# EAGLE board SparkFun-Blynk-Thing-ProtoPanel_v02 (EAGLE 7.5.0), part 1 of 7
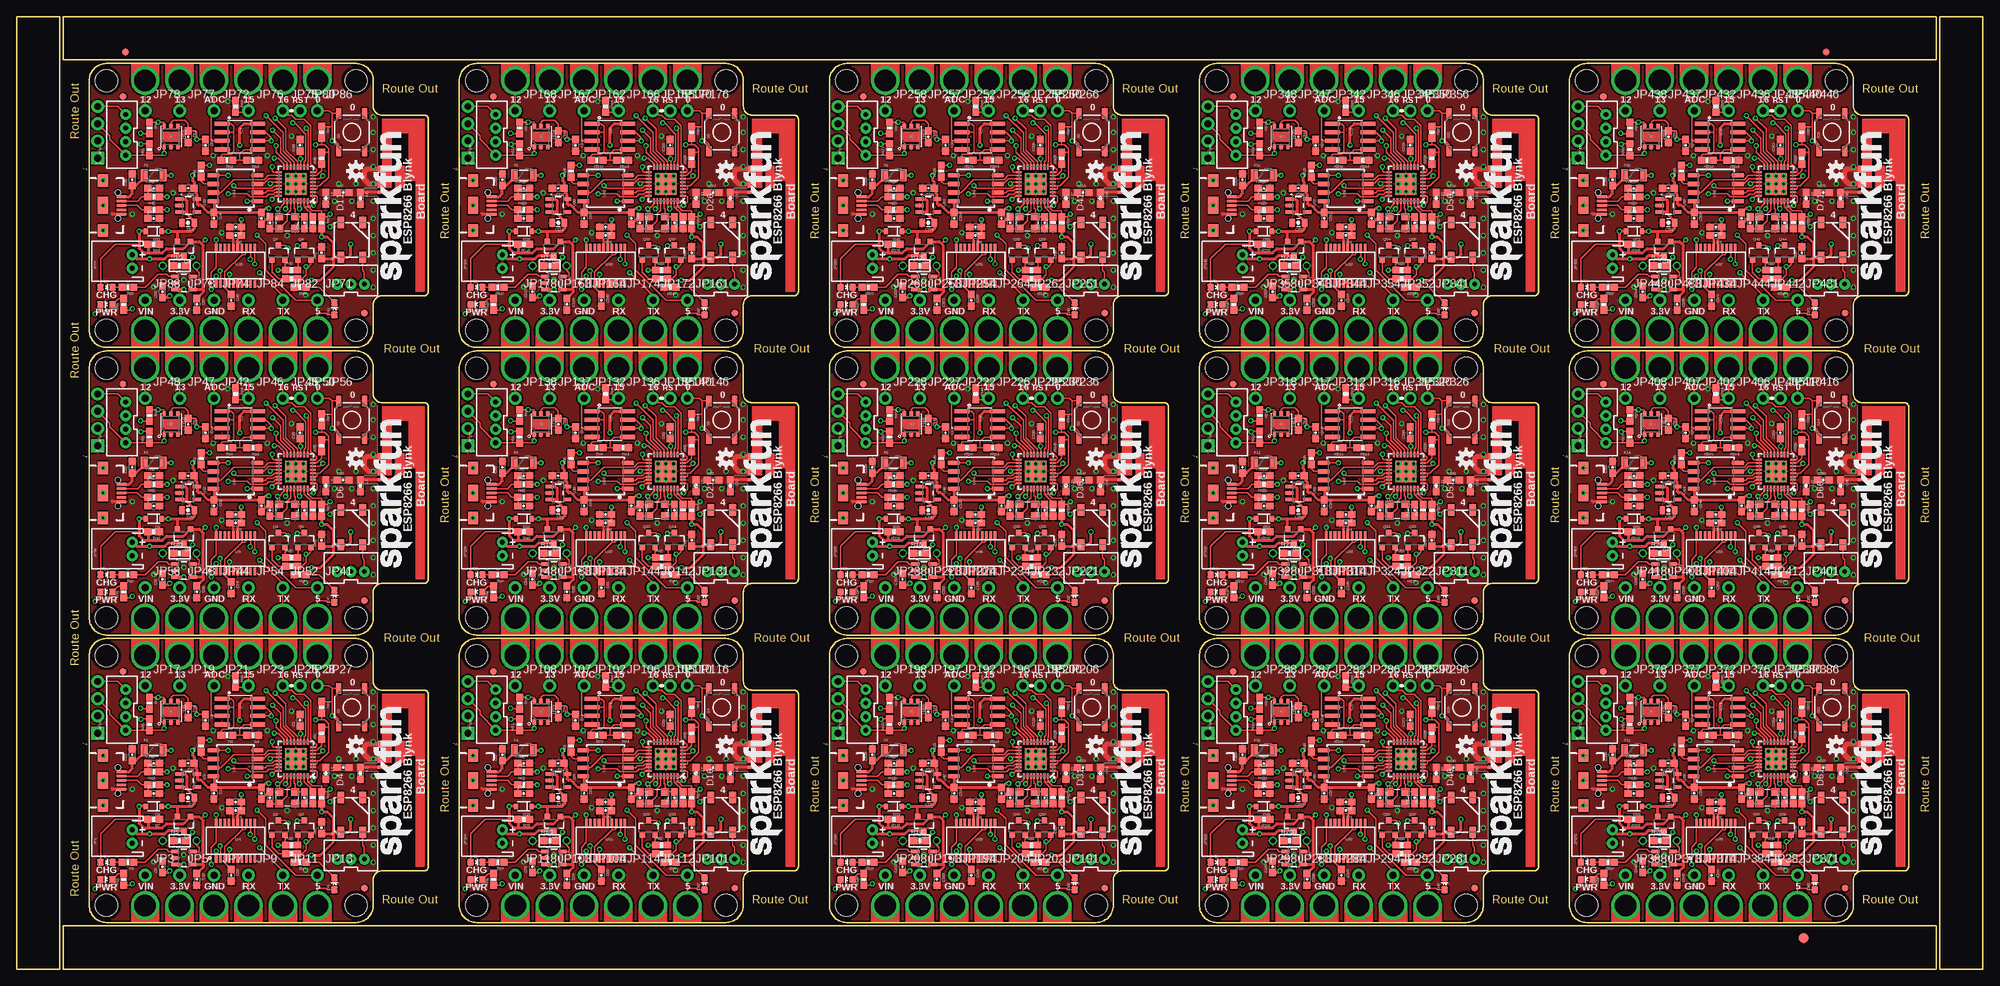
[diagram p0: board, top side]
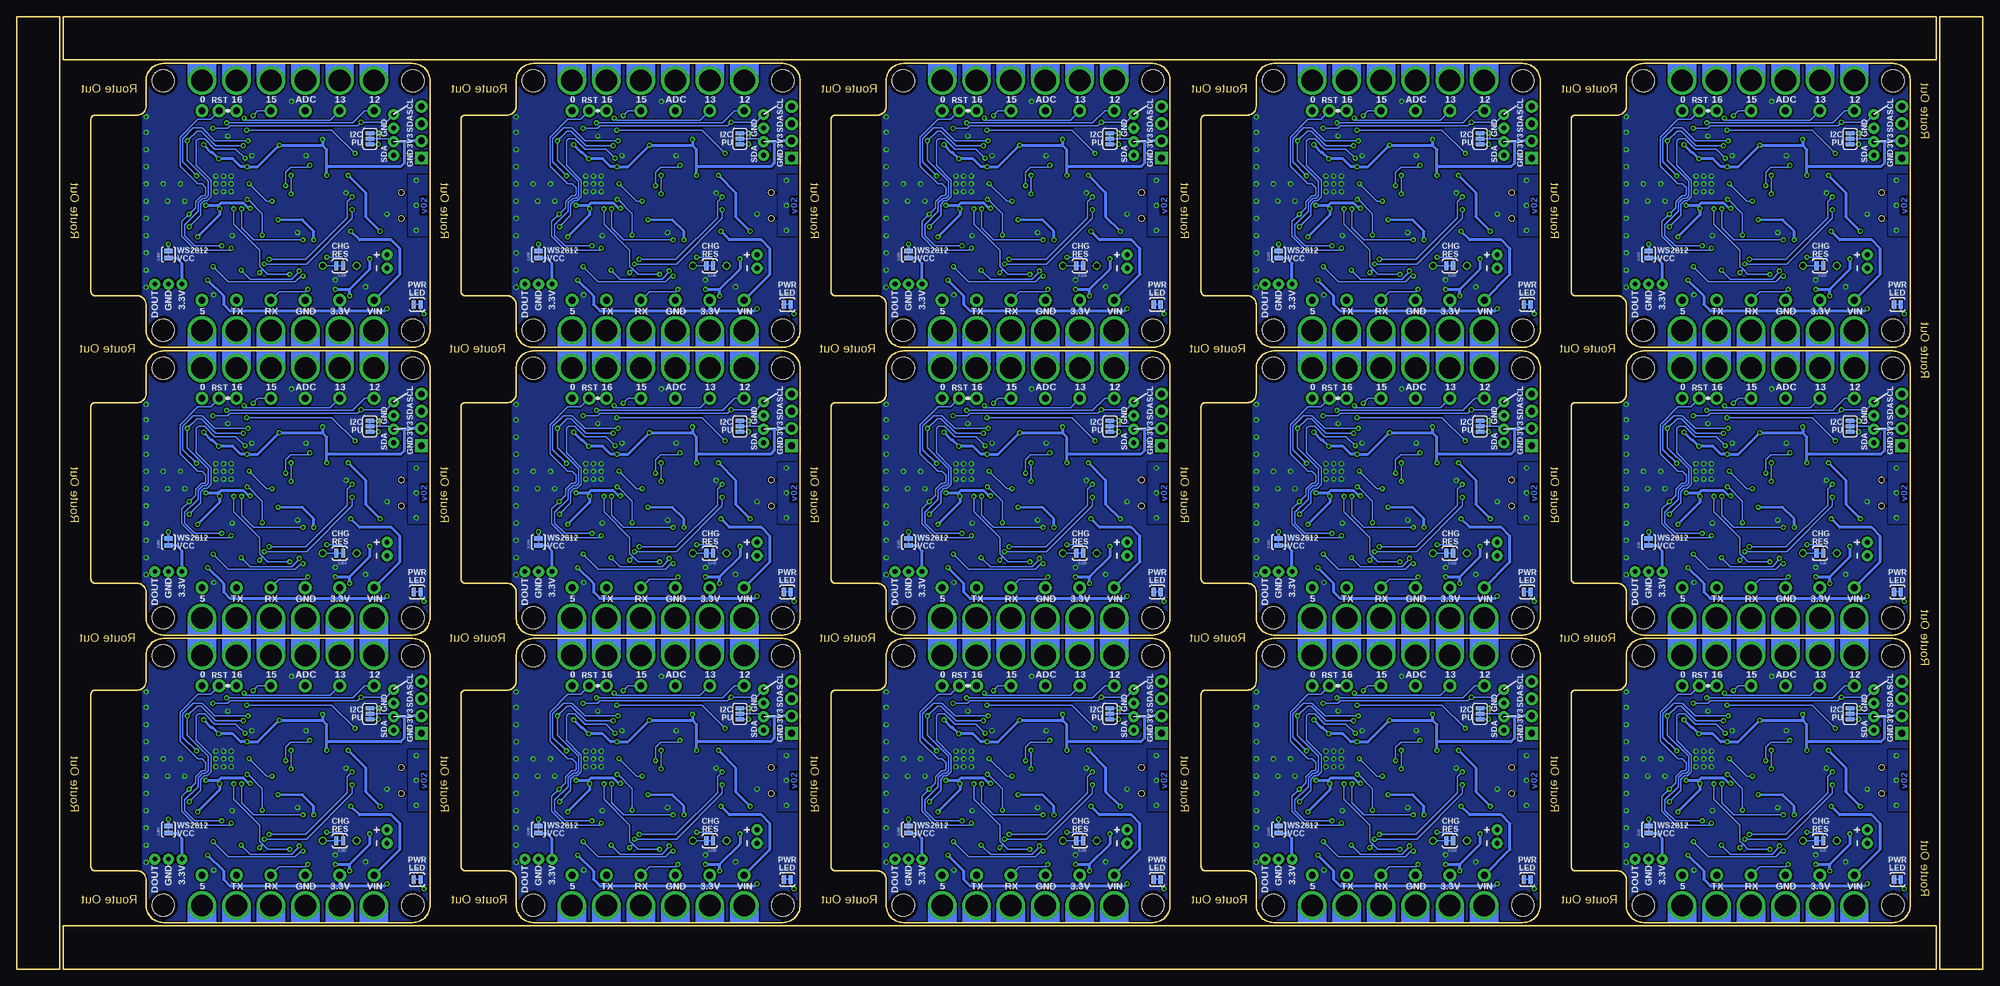
[diagram p1: board, bottom side, seen from below]

Size 290.07 x 140.46 mm. Coordinates in mm from the lower left corner, seen from the top.
Outline: 264 segments
Copper layers (1*16): Top 0.035mm / dielectric 1.5mm / Bottom 0.035mm
Design rules "SparkFun-2-layer-TIGHT": minimum track width 7mil, minimum drill 15mil, track to track 7mil, track to pad 7mil, pad to pad 7mil, via to via 7mil, smd to smd 7mil, copper to edge 7mil, drill to drill 7mil, minimum pad ring 7mil, minimum via ring 7mil, stop-mask expansion 4mil, vias tented up to drill 20mil, thermal gap 10mil

## Footprints (pad centres in the part's own frame; a part is rotated, then mirrored left to right if it is on the bottom)
0603-CAP = smd 1.1 x 1: 1 -0.85,0; 2 0.85,0
0805-CAP = smd 0.8 x 1.2: 1 -0.9,0; 2 0.9,0
LED-0603 = smd 1 x 1: A 0,-0.877; C 0,0.877
SOD-323 = smd 0.63 x 0.83: A 1.15,0; C -1.15,0
WS2812B = smd 1.651 x 1: 1 -2.577,1.6; 2 -2.577,-1.6; 3 2.577,-1.6; 4 2.577,1.6
TRACE_ANTENNA_2.4GHZ_25.7MM = smd 0.46 x 0.46: ANT 0,0.23 | smd 1 x 0.46: GND -1.18,0.23; GND2 -3.38,0.23
FIDUCIAL-1.5X3 = smd 1.5 x 1.5: 1 0,0
FIDUCIAL-1X2 = smd 1 x 1: 1 0,0
PTC-1206 = smd 1 x 1.8: 1 -1.4,0; 2 1.4,0
SO08 = smd 0.61 x 2.21: 1 -1.905,-2.616; 2 -0.635,-2.616; 3 0.635,-2.616; 4 1.905,-2.616; 5 1.905,2.616; 6 0.635,2.616; 7 -0.635,2.616; 8 -1.905,2.616
JST-2-PTH = drill 0.7 pad 1.6: 1 -1,0; 2 1,0
1X01_ALLIGATOR_3MM_HALF = drill 3.175: 1@2 0,0
1X01_NO_SILK = drill 1.016 pad 1.88: 1 0,0
JST-3-PTH-VERT = drill 0.7 pad 1.6: 1 -2,-0.55; 2 0,-0.55; 3 2,-0.55
USB-B-MICRO-SMD_V03 = smd 1.45 x 0.4: D+ 2.725,0; D- 2.725,0.65; GND 2.725,-1.3; ID 2.725,-0.65; VBUS 2.725,1.3 | smd 1.5 x 1.8: SHIELD1 0,3.685; SHIELD2 0,-3.685 | smd 1.5 x 2.5: SHIELD3 0,0 | hole 0.85: 2.2,1.9; 2.2,-1.9
JST-4-PTH-VERT = drill 0.7 pad 1.6: 1 -3,-0.55; 2 -1,-0.55; 3 1,-0.55; 4 3,-0.55
1X04_NO_SILK = drill 1.016 pad 1.88 square: 1 0,0 | drill 1.016 pad 1.88: 2 2.54,0; 3 5.08,0; 4 7.62,0
0603 = smd 1.1 x 1: 1 -0.85,0; 2 0.85,0
SOT23-3 = smd 0.8 x 0.9: 1 -0.95,-1; 2 0.95,-1; 3 0,1.1
SOT23-3@1 = smd 0.8 x 0.9: 1 -0.95,-1; 2 0.95,-1; 3 0,1.1
0603-RES = smd 1.1 x 1: 1 -0.85,0; 2 0.85,0
1/6W-RES = drill 0.762: 1 -2.5,0; 2 2.5,0
0603-RES@1 = smd 1.1 x 1: 1 -0.85,0; 2 0.85,0
TACTILE-SWITCH-SMD = smd 1.524 x 0.762: 1 -2.794,1.905; 2 2.794,1.905; 3 -2.794,-1.905; 4 2.794,-1.905
PAD-JUMPER-2-NC_BY_TRACE_YES_SILK = smd 0.635 x 1.27: 1 -0.508,0; 2 0.508,0
PAD-JUMPER-3-3OF3_NC_BY_TRACE_YES_SILK_FULL_BOX = smd 0.635 x 1.27: 1 -0.813,0; 2 0,0; 3 0.813,0
STAND-OFF = hole 3.302: 0,0
SOT23-5 = smd 0.55 x 1.2: 1 -0.95,-1.3; 2 0,-1.3; 3 0.95,-1.3; 4 0.95,1.3; 5 -0.95,1.3
QFN32 = smd 0.8 x 0.285: 1 -2.5,1.75; 2 -2.5,1.25; 3 -2.5,0.75; 4 -2.5,0.25; 5 -2.5,-0.25; 6 -2.5,-0.75; 7 -2.5,-1.25; 8 -2.5,-1.75; 17 2.5,-1.75; 18 2.5,-1.25; 19 2.5,-0.75; 20 2.5,-0.25; 21 2.5,0.25; 22 2.5,0.75; 23 2.5,1.25; 24 2.5,1.75 | smd 0.285 x 0.8: 9 -1.75,-2.5; 10 -1.25,-2.5; 11 -0.75,-2.5; 12 -0.25,-2.5; 13 0.25,-2.5; 14 0.75,-2.5; 15 1.25,-2.5; 16 1.75,-2.5; 25 1.75,2.5; 26 1.25,2.5; 27 0.75,2.5; 28 0.25,2.5; 29 -0.25,2.5; 30 -0.75,2.5; 31 -1.25,2.5; 32 -1.75,2.5 | smd 3.15 x 3.15: EP 0,0
SSOP20_L = smd 0.381 x 1.143: 1 -2.857,-2.68; 2 -2.223,-2.68; 3 -1.587,-2.68; 4 -0.953,-2.68; 5 -0.318,-2.68; 6 0.318,-2.68; 7 0.953,-2.68; 8 1.587,-2.68; 9 2.223,-2.68; 10 2.857,-2.68; 11 2.857,2.68; 12 2.223,2.68; 13 1.587,2.68; 14 0.953,2.68; 15 0.318,2.68; 16 -0.318,2.68; 17 -0.953,2.68; 18 -1.587,2.68; 19 -2.223,2.68; 20 -2.857,2.68
SOIC-8 = smd 0.61 x 1.702: 1 -1.905,-3.251; 2 -0.635,-3.251; 3 0.635,-3.251; 4 1.905,-3.251; 5 1.905,3.251; 6 0.635,3.251; 7 -0.635,3.251; 8 -1.905,3.251
SI7021 = smd 0.2 x 0.2: 7 0,0 | smd 0.8 x 0.5: DATA 1.5,-1; GND 1.5,0; NC@3 1.5,1; NC@4 -1.5,1; SCK -1.5,-1; VDD -1.5,0
CRYSTAL-SMD-3.2X2.5 = smd 1.2 x 1.1: 1 -1.175,-0.875; 2 1.175,-0.875; 3 1.175,0.875; 4 -1.175,0.875

## Placement (x,y rotation side)
C1  10uF  [0603-CAP]  36.07,25.91 270 top
C2  0.1uF  [0603-CAP]  41.78,36.7 90 top
C3  10pF  [0603-CAP]  37.34,25.27 270 top
C4  10pF  [0603-CAP]  42.42,25.27 90 top
C5  0.1uF  [0603-CAP]  27.81,36.7 270 top
C6  4.7uF  [0603-CAP]  21.46,15.11 90 top
C7  1.0uF  [0805-CAP]  25.27,25.27 180 top
C8  5.6pF  [0603-CAP]  48.13,29.72 0 top
C9  0.1uF  [0603-CAP]  44.96,20.83 90 top
C10  2.2uF  [0603-CAP]  25.27,30.35 180 top
C11  0.1uF  [0603-CAP]  17.02,31.62 90 top
C12  47pF  [0603-CAP]  20.19,30.35 0 top
C13  47pF  [0603-CAP]  20.19,25.91 0 top
C14  0.1uF  [0603-CAP]  32.26,23.37 180 top
C15  4.7uF  [0603-CAP]  32.26,24.64 180 top
C16  0.1uF  [0603-CAP]  31.62,13.84 270 top
C17  0.1uF  [0603-CAP]  29.08,25.91 270 top
C18  0.1uF  [0603-CAP]  25.27,37.97 270 top
C19  4.7uF  [0603-CAP]  26.54,13.21 270 top
C20  10uF  [0603-CAP]  36.07,68.33 270 top
C21  0.1uF  [0603-CAP]  29.08,68.33 270 top
C22  47pF  [0603-CAP]  20.19,68.33 0 top
C23  0.1uF  [0603-CAP]  32.26,65.79 180 top
C24  0.1uF  [0603-CAP]  31.62,56.26 270 top
C25  0.1uF  [0603-CAP]  41.78,79.12 90 top
C26  10pF  [0603-CAP]  37.34,67.69 270 top
C27  10pF  [0603-CAP]  42.42,67.69 90 top
C28  5.6pF  [0603-CAP]  48.13,72.14 0 top
C29  0.1uF  [0603-CAP]  17.02,74.04 90 top
C30  47pF  [0603-CAP]  20.19,72.77 0 top
C31  4.7uF  [0603-CAP]  32.26,67.06 180 top
C32  0.1uF  [0603-CAP]  25.27,80.39 270 top
C33  0.1uF  [0603-CAP]  44.96,63.25 90 top
C34  0.1uF  [0603-CAP]  27.81,79.12 270 top
C35  1.0uF  [0805-CAP]  25.27,67.69 180 top
C36  2.2uF  [0603-CAP]  25.27,72.77 180 top
C37  4.7uF  [0603-CAP]  21.46,57.53 90 top
C38  4.7uF  [0603-CAP]  26.54,55.63 270 top
C39  10uF  [0603-CAP]  36.07,110.74 270 top
C40  0.1uF  [0603-CAP]  29.08,110.74 270 top
C41  47pF  [0603-CAP]  20.19,110.74 0 top
C42  0.1uF  [0603-CAP]  32.26,108.2 180 top
C43  0.1uF  [0603-CAP]  31.62,98.68 270 top
C44  0.1uF  [0603-CAP]  41.78,121.54 90 top
C45  10pF  [0603-CAP]  37.34,110.11 270 top
C46  10pF  [0603-CAP]  42.42,110.11 90 top
C47  5.6pF  [0603-CAP]  48.13,114.55 0 top
C48  0.1uF  [0603-CAP]  17.02,116.46 90 top
C49  47pF  [0603-CAP]  20.19,115.19 0 top
C50  4.7uF  [0603-CAP]  32.26,109.47 180 top
C51  0.1uF  [0603-CAP]  25.27,122.81 270 top
C52  0.1uF  [0603-CAP]  44.96,105.66 90 top
C53  0.1uF  [0603-CAP]  27.81,121.54 270 top
C54  1.0uF  [0805-CAP]  25.27,110.11 180 top
C55  2.2uF  [0603-CAP]  25.27,115.19 180 top
C56  4.7uF  [0603-CAP]  21.46,99.95 90 top
C57  4.7uF  [0603-CAP]  26.54,98.04 270 top
C58  10uF  [0603-CAP]  90.68,25.91 270 top
C59  0.1uF  [0603-CAP]  83.69,25.91 270 top
C60  47pF  [0603-CAP]  74.8,25.91 0 top
C61  0.1uF  [0603-CAP]  86.87,23.37 180 top
C62  0.1uF  [0603-CAP]  86.23,13.84 270 top
C63  0.1uF  [0603-CAP]  96.39,36.7 90 top
C64  10pF  [0603-CAP]  91.95,25.27 270 top
C65  10pF  [0603-CAP]  97.03,25.27 90 top
C66  5.6pF  [0603-CAP]  102.74,29.72 0 top
C67  0.1uF  [0603-CAP]  71.63,31.62 90 top
C68  47pF  [0603-CAP]  74.8,30.35 0 top
C69  4.7uF  [0603-CAP]  86.87,24.64 180 top
C70  0.1uF  [0603-CAP]  79.88,37.97 270 top
C71  0.1uF  [0603-CAP]  99.57,20.83 90 top
C72  0.1uF  [0603-CAP]  82.42,36.7 270 top
C73  1.0uF  [0805-CAP]  79.88,25.27 180 top
C74  2.2uF  [0603-CAP]  79.88,30.35 180 top
C75  4.7uF  [0603-CAP]  76.07,15.11 90 top
C76  4.7uF  [0603-CAP]  81.15,13.21 270 top
C77  10uF  [0603-CAP]  90.68,68.33 270 top
C78  0.1uF  [0603-CAP]  83.69,68.33 270 top
C79  47pF  [0603-CAP]  74.8,68.33 0 top
C80  0.1uF  [0603-CAP]  86.87,65.79 180 top
C81  0.1uF  [0603-CAP]  86.23,56.26 270 top
C82  0.1uF  [0603-CAP]  96.39,79.12 90 top
C83  10pF  [0603-CAP]  91.95,67.69 270 top
C84  10pF  [0603-CAP]  97.03,67.69 90 top
C85  5.6pF  [0603-CAP]  102.74,72.14 0 top
C86  0.1uF  [0603-CAP]  71.63,74.04 90 top
C87  47pF  [0603-CAP]  74.8,72.77 0 top
C88  4.7uF  [0603-CAP]  86.87,67.06 180 top
C89  0.1uF  [0603-CAP]  79.88,80.39 270 top
C90  0.1uF  [0603-CAP]  99.57,63.25 90 top
C91  0.1uF  [0603-CAP]  82.42,79.12 270 top
C92  1.0uF  [0805-CAP]  79.88,67.69 180 top
C93  2.2uF  [0603-CAP]  79.88,72.77 180 top
C94  4.7uF  [0603-CAP]  76.07,57.53 90 top
C95  4.7uF  [0603-CAP]  81.15,55.63 270 top
C96  10uF  [0603-CAP]  90.68,110.74 270 top
C97  0.1uF  [0603-CAP]  83.69,110.74 270 top
C98  47pF  [0603-CAP]  74.8,110.74 0 top
C99  0.1uF  [0603-CAP]  86.87,108.2 180 top
C100  0.1uF  [0603-CAP]  86.23,98.68 270 top
C101  0.1uF  [0603-CAP]  96.39,121.54 90 top
C102  10pF  [0603-CAP]  91.95,110.11 270 top
C103  10pF  [0603-CAP]  97.03,110.11 90 top
C104  5.6pF  [0603-CAP]  102.74,114.55 0 top
C105  0.1uF  [0603-CAP]  71.63,116.46 90 top
C106  47pF  [0603-CAP]  74.8,115.19 0 top
C107  4.7uF  [0603-CAP]  86.87,109.47 180 top
C108  0.1uF  [0603-CAP]  79.88,122.81 270 top
C109  0.1uF  [0603-CAP]  99.57,105.66 90 top
C110  0.1uF  [0603-CAP]  82.42,121.54 270 top
C111  1.0uF  [0805-CAP]  79.88,110.11 180 top
C112  2.2uF  [0603-CAP]  79.88,115.19 180 top
C113  4.7uF  [0603-CAP]  76.07,99.95 90 top
C114  4.7uF  [0603-CAP]  81.15,98.04 270 top
C115  10uF  [0603-CAP]  145.29,25.91 270 top
C116  0.1uF  [0603-CAP]  138.3,25.91 270 top
C117  47pF  [0603-CAP]  129.41,25.91 0 top
C118  0.1uF  [0603-CAP]  141.48,23.37 180 top
C119  0.1uF  [0603-CAP]  140.84,13.84 270 top
C120  0.1uF  [0603-CAP]  151,36.7 90 top
C121  10pF  [0603-CAP]  146.56,25.27 270 top
C122  10pF  [0603-CAP]  151.64,25.27 90 top
C123  5.6pF  [0603-CAP]  157.35,29.72 0 top
C124  0.1uF  [0603-CAP]  126.24,31.62 90 top
C125  47pF  [0603-CAP]  129.41,30.35 0 top
C126  4.7uF  [0603-CAP]  141.48,24.64 180 top
C127  0.1uF  [0603-CAP]  134.49,37.97 270 top
C128  0.1uF  [0603-CAP]  154.18,20.83 90 top
C129  0.1uF  [0603-CAP]  137.03,36.7 270 top
C130  1.0uF  [0805-CAP]  134.49,25.27 180 top
C131  2.2uF  [0603-CAP]  134.49,30.35 180 top
C132  4.7uF  [0603-CAP]  130.68,15.11 90 top
C133  4.7uF  [0603-CAP]  135.76,13.21 270 top
C134  10uF  [0603-CAP]  145.29,68.33 270 top
C135  0.1uF  [0603-CAP]  138.3,68.33 270 top
C136  47pF  [0603-CAP]  129.41,68.33 0 top
C137  0.1uF  [0603-CAP]  141.48,65.79 180 top
C138  0.1uF  [0603-CAP]  140.84,56.26 270 top
C139  0.1uF  [0603-CAP]  151,79.12 90 top
C140  10pF  [0603-CAP]  146.56,67.69 270 top
C141  10pF  [0603-CAP]  151.64,67.69 90 top
C142  5.6pF  [0603-CAP]  157.35,72.14 0 top
C143  0.1uF  [0603-CAP]  126.24,74.04 90 top
C144  47pF  [0603-CAP]  129.41,72.77 0 top
C145  4.7uF  [0603-CAP]  141.48,67.06 180 top
C146  0.1uF  [0603-CAP]  134.49,80.39 270 top
C147  0.1uF  [0603-CAP]  154.18,63.25 90 top
C148  0.1uF  [0603-CAP]  137.03,79.12 270 top
C149  1.0uF  [0805-CAP]  134.49,67.69 180 top
C150  2.2uF  [0603-CAP]  134.49,72.77 180 top
C151  4.7uF  [0603-CAP]  130.68,57.53 90 top
C152  4.7uF  [0603-CAP]  135.76,55.63 270 top
C153  10uF  [0603-CAP]  145.29,110.74 270 top
C154  0.1uF  [0603-CAP]  138.3,110.74 270 top
C155  47pF  [0603-CAP]  129.41,110.74 0 top
C156  0.1uF  [0603-CAP]  141.48,108.2 180 top
C157  0.1uF  [0603-CAP]  140.84,98.68 270 top
C158  0.1uF  [0603-CAP]  151,121.54 90 top
C159  10pF  [0603-CAP]  146.56,110.11 270 top
C160  10pF  [0603-CAP]  151.64,110.11 90 top
C161  5.6pF  [0603-CAP]  157.35,114.55 0 top
C162  0.1uF  [0603-CAP]  126.24,116.46 90 top
C163  47pF  [0603-CAP]  129.41,115.19 0 top
C164  4.7uF  [0603-CAP]  141.48,109.47 180 top
C165  0.1uF  [0603-CAP]  134.49,122.81 270 top
C166  0.1uF  [0603-CAP]  154.18,105.66 90 top
C167  0.1uF  [0603-CAP]  137.03,121.54 270 top
C168  1.0uF  [0805-CAP]  134.49,110.11 180 top
C169  2.2uF  [0603-CAP]  134.49,115.19 180 top
C170  4.7uF  [0603-CAP]  130.68,99.95 90 top
C171  4.7uF  [0603-CAP]  135.76,98.04 270 top
C172  10uF  [0603-CAP]  199.9,25.91 270 top
C173  0.1uF  [0603-CAP]  192.91,25.91 270 top
C174  47pF  [0603-CAP]  184.02,25.91 0 top
C175  0.1uF  [0603-CAP]  196.09,23.37 180 top
C176  0.1uF  [0603-CAP]  195.45,13.84 270 top
C177  0.1uF  [0603-CAP]  205.61,36.7 90 top
C178  10pF  [0603-CAP]  201.17,25.27 270 top
C179  10pF  [0603-CAP]  206.25,25.27 90 top
C180  5.6pF  [0603-CAP]  211.96,29.72 0 top
C181  0.1uF  [0603-CAP]  180.85,31.62 90 top
C182  47pF  [0603-CAP]  184.02,30.35 0 top
C183  4.7uF  [0603-CAP]  196.09,24.64 180 top
C184  0.1uF  [0603-CAP]  189.1,37.97 270 top
C185  0.1uF  [0603-CAP]  208.79,20.83 90 top
C186  0.1uF  [0603-CAP]  191.64,36.7 270 top
C187  1.0uF  [0805-CAP]  189.1,25.27 180 top
C188  2.2uF  [0603-CAP]  189.1,30.35 180 top
C189  4.7uF  [0603-CAP]  185.29,15.11 90 top
C190  4.7uF  [0603-CAP]  190.37,13.21 270 top
C191  10uF  [0603-CAP]  199.9,68.33 270 top
C192  0.1uF  [0603-CAP]  192.91,68.33 270 top
C193  47pF  [0603-CAP]  184.02,68.33 0 top
C194  0.1uF  [0603-CAP]  196.09,65.79 180 top
C195  0.1uF  [0603-CAP]  195.45,56.26 270 top
C196  0.1uF  [0603-CAP]  205.61,79.12 90 top
C197  10pF  [0603-CAP]  201.17,67.69 270 top
C198  10pF  [0603-CAP]  206.25,67.69 90 top
C199  5.6pF  [0603-CAP]  211.96,72.14 0 top
C200  0.1uF  [0603-CAP]  180.85,74.04 90 top
C201  47pF  [0603-CAP]  184.02,72.77 0 top
C202  4.7uF  [0603-CAP]  196.09,67.06 180 top
C203  0.1uF  [0603-CAP]  189.1,80.39 270 top
C204  0.1uF  [0603-CAP]  208.79,63.25 90 top
C205  0.1uF  [0603-CAP]  191.64,79.12 270 top
C206  1.0uF  [0805-CAP]  189.1,67.69 180 top
C207  2.2uF  [0603-CAP]  189.1,72.77 180 top
C208  4.7uF  [0603-CAP]  185.29,57.53 90 top
C209  4.7uF  [0603-CAP]  190.37,55.63 270 top
C210  10uF  [0603-CAP]  199.9,110.74 270 top
C211  0.1uF  [0603-CAP]  192.91,110.74 270 top
C212  47pF  [0603-CAP]  184.02,110.74 0 top
C213  0.1uF  [0603-CAP]  196.09,108.2 180 top
C214  0.1uF  [0603-CAP]  195.45,98.68 270 top
C215  0.1uF  [0603-CAP]  205.61,121.54 90 top
C216  10pF  [0603-CAP]  201.17,110.11 270 top
C217  10pF  [0603-CAP]  206.25,110.11 90 top
C218  5.6pF  [0603-CAP]  211.96,114.55 0 top
C219  0.1uF  [0603-CAP]  180.85,116.46 90 top
C220  47pF  [0603-CAP]  184.02,115.19 0 top
C221  4.7uF  [0603-CAP]  196.09,109.47 180 top
C222  0.1uF  [0603-CAP]  189.1,122.81 270 top
C223  0.1uF  [0603-CAP]  208.79,105.66 90 top
C224  0.1uF  [0603-CAP]  191.64,121.54 270 top
C225  1.0uF  [0805-CAP]  189.1,110.11 180 top
C226  2.2uF  [0603-CAP]  189.1,115.19 180 top
C227  4.7uF  [0603-CAP]  185.29,99.95 90 top
C228  4.7uF  [0603-CAP]  190.37,98.04 270 top
C229  10uF  [0603-CAP]  254.51,25.91 270 top
C230  0.1uF  [0603-CAP]  247.52,25.91 270 top
C231  47pF  [0603-CAP]  238.63,25.91 0 top
C232  0.1uF  [0603-CAP]  250.7,23.37 180 top
C233  0.1uF  [0603-CAP]  250.06,13.84 270 top
C234  0.1uF  [0603-CAP]  260.22,36.7 90 top
C235  10pF  [0603-CAP]  255.78,25.27 270 top
C236  10pF  [0603-CAP]  260.86,25.27 90 top
C237  5.6pF  [0603-CAP]  266.57,29.72 0 top
C238  0.1uF  [0603-CAP]  235.46,31.62 90 top
C239  47pF  [0603-CAP]  238.63,30.35 0 top
C240  4.7uF  [0603-CAP]  250.7,24.64 180 top
C241  0.1uF  [0603-CAP]  243.71,37.97 270 top
C242  0.1uF  [0603-CAP]  263.4,20.83 90 top
C243  0.1uF  [0603-CAP]  246.25,36.7 270 top
C244  1.0uF  [0805-CAP]  243.71,25.27 180 top
C245  2.2uF  [0603-CAP]  243.71,30.35 180 top
C246  4.7uF  [0603-CAP]  239.9,15.11 90 top
C247  4.7uF  [0603-CAP]  244.98,13.21 270 top
C248  10uF  [0603-CAP]  254.51,68.33 270 top
C249  0.1uF  [0603-CAP]  247.52,68.33 270 top
C250  47pF  [0603-CAP]  238.63,68.33 0 top
C251  0.1uF  [0603-CAP]  250.7,65.79 180 top
C252  0.1uF  [0603-CAP]  250.06,56.26 270 top
C253  0.1uF  [0603-CAP]  260.22,79.12 90 top
C254  10pF  [0603-CAP]  255.78,67.69 270 top
C255  10pF  [0603-CAP]  260.86,67.69 90 top
C256  5.6pF  [0603-CAP]  266.57,72.14 0 top
C257  0.1uF  [0603-CAP]  235.46,74.04 90 top
C258  47pF  [0603-CAP]  238.63,72.77 0 top
C259  4.7uF  [0603-CAP]  250.7,67.06 180 top
C260  0.1uF  [0603-CAP]  243.71,80.39 270 top
C261  0.1uF  [0603-CAP]  263.4,63.25 90 top
C262  0.1uF  [0603-CAP]  246.25,79.12 270 top
C263  1.0uF  [0805-CAP]  243.71,67.69 180 top
C264  2.2uF  [0603-CAP]  243.71,72.77 180 top
C265  4.7uF  [0603-CAP]  239.9,57.53 90 top
C266  4.7uF  [0603-CAP]  244.98,55.63 270 top
C267  10uF  [0603-CAP]  254.51,110.74 270 top
C268  0.1uF  [0603-CAP]  247.52,110.74 270 top
C269  47pF  [0603-CAP]  238.63,110.74 0 top
C270  0.1uF  [0603-CAP]  250.7,108.2 180 top
C271  0.1uF  [0603-CAP]  250.06,98.68 270 top
C272  0.1uF  [0603-CAP]  260.22,121.54 90 top
C273  10pF  [0603-CAP]  255.78,110.11 270 top
C274  10pF  [0603-CAP]  260.86,110.11 90 top
C275  5.6pF  [0603-CAP]  266.57,114.55 0 top
C276  0.1uF  [0603-CAP]  235.46,116.46 90 top
C277  47pF  [0603-CAP]  238.63,115.19 0 top
C278  4.7uF  [0603-CAP]  250.7,109.47 180 top
C279  0.1uF  [0603-CAP]  243.71,122.81 270 top
C280  0.1uF  [0603-CAP]  263.4,105.66 90 top
C281  0.1uF  [0603-CAP]  246.25,121.54 270 top
C282  1.0uF  [0805-CAP]  243.71,110.11 180 top
C283  2.2uF  [0603-CAP]  243.71,115.19 180 top
C284  4.7uF  [0603-CAP]  239.9,99.95 90 top
C285  4.7uF  [0603-CAP]  244.98,98.04 270 top
D1  Yellow  [LED-0603]  13.21,15.75 270 top
D2  BAT20J  [SOD-323]  20.19,24 180 top
D3  BLUE  [LED-0603]  46.86,12.57 0 top
D4  WS2812  [WS2812B]  49.4,22.73 90 top
D5  RED  [LED-0603]  13.21,13.21 90 top
D6  WS2812  [WS2812B]  49.4,65.15 90 top
D7  BLUE  [LED-0603]  46.86,54.99 0 top
D8  BAT20J  [SOD-323]  20.19,66.42 180 top
D9  Yellow  [LED-0603]  13.21,58.17 270 top
D10  RED  [LED-0603]  13.21,55.63 90 top
D11  WS2812  [WS2812B]  49.4,107.57 90 top
D12  BLUE  [LED-0603]  46.86,97.41 0 top
D13  BAT20J  [SOD-323]  20.19,108.84 180 top
D14  Yellow  [LED-0603]  13.21,100.58 270 top
D15  RED  [LED-0603]  13.21,98.04 90 top
D16  WS2812  [WS2812B]  104.01,22.73 90 top
D17  BLUE  [LED-0603]  101.47,12.57 0 top
D18  BAT20J  [SOD-323]  74.8,24 180 top
D19  Yellow  [LED-0603]  67.82,15.75 270 top
D20  RED  [LED-0603]  67.82,13.21 90 top
D21  WS2812  [WS2812B]  104.01,65.15 90 top
D22  BLUE  [LED-0603]  101.47,54.99 0 top
D23  BAT20J  [SOD-323]  74.8,66.42 180 top
D24  Yellow  [LED-0603]  67.82,58.17 270 top
D25  RED  [LED-0603]  67.82,55.63 90 top
D26  WS2812  [WS2812B]  104.01,107.57 90 top
D27  BLUE  [LED-0603]  101.47,97.41 0 top
D28  BAT20J  [SOD-323]  74.8,108.84 180 top
D29  Yellow  [LED-0603]  67.82,100.58 270 top
D30  RED  [LED-0603]  67.82,98.04 90 top
D31  WS2812  [WS2812B]  158.62,22.73 90 top
D32  BLUE  [LED-0603]  156.08,12.57 0 top
D33  BAT20J  [SOD-323]  129.41,24 180 top
D34  Yellow  [LED-0603]  122.43,15.75 270 top
D35  RED  [LED-0603]  122.43,13.21 90 top
D36  WS2812  [WS2812B]  158.62,65.15 90 top
D37  BLUE  [LED-0603]  156.08,54.99 0 top
D38  BAT20J  [SOD-323]  129.41,66.42 180 top
D39  Yellow  [LED-0603]  122.43,58.17 270 top
D40  RED  [LED-0603]  122.43,55.63 90 top
D41  WS2812  [WS2812B]  158.62,107.57 90 top
D42  BLUE  [LED-0603]  156.08,97.41 0 top
D43  BAT20J  [SOD-323]  129.41,108.84 180 top
D44  Yellow  [LED-0603]  122.43,100.58 270 top
D45  RED  [LED-0603]  122.43,98.04 90 top
D46  WS2812  [WS2812B]  213.23,22.73 90 top
D47  BLUE  [LED-0603]  210.69,12.57 0 top
D48  BAT20J  [SOD-323]  184.02,24 180 top
D49  Yellow  [LED-0603]  177.04,15.75 270 top
D50  RED  [LED-0603]  177.04,13.21 90 top
D51  WS2812  [WS2812B]  213.23,65.15 90 top
D52  BLUE  [LED-0603]  210.69,54.99 0 top
D53  BAT20J  [SOD-323]  184.02,66.42 180 top
D54  Yellow  [LED-0603]  177.04,58.17 270 top
D55  RED  [LED-0603]  177.04,55.63 90 top
D56  WS2812  [WS2812B]  213.23,107.57 90 top
D57  BLUE  [LED-0603]  210.69,97.41 0 top
D58  BAT20J  [SOD-323]  184.02,108.84 180 top
D59  Yellow  [LED-0603]  177.04,100.58 270 top
D60  RED  [LED-0603]  177.04,98.04 90 top
D61  WS2812  [WS2812B]  267.84,22.73 90 top
D62  BLUE  [LED-0603]  265.3,12.57 0 top
D63  BAT20J  [SOD-323]  238.63,24 180 top
D64  Yellow  [LED-0603]  231.65,15.75 270 top
D65  RED  [LED-0603]  231.65,13.21 90 top
D66  WS2812  [WS2812B]  267.84,65.15 90 top
D67  BLUE  [LED-0603]  265.3,54.99 0 top
D68  BAT20J  [SOD-323]  238.63,66.42 180 top
D69  Yellow  [LED-0603]  231.65,58.17 270 top
D70  RED  [LED-0603]  231.65,55.63 90 top
D71  WS2812  [WS2812B]  267.84,107.57 90 top
D72  BLUE  [LED-0603]  265.3,97.41 0 top
D73  BAT20J  [SOD-323]  238.63,108.84 180 top
D74  Yellow  [LED-0603]  231.65,100.58 270 top
D75  RED  [LED-0603]  231.65,98.04 90 top
E1  ANTENNATRACE  [TRACE_ANTENNA_2.4GHZ_25.7MM]  53.21,29.78 270 top
E2  ANTENNATRACE  [TRACE_ANTENNA_2.4GHZ_25.7MM]  53.21,72.2 270 top
E3  ANTENNATRACE  [TRACE_ANTENNA_2.4GHZ_25.7MM]  53.21,114.62 270 top
E4  ANTENNATRACE  [TRACE_ANTENNA_2.4GHZ_25.7MM]  107.82,29.78 270 top
E5  ANTENNATRACE  [TRACE_ANTENNA_2.4GHZ_25.7MM]  107.82,72.2 270 top
E6  ANTENNATRACE  [TRACE_ANTENNA_2.4GHZ_25.7MM]  107.82,114.62 270 top
E7  ANTENNATRACE  [TRACE_ANTENNA_2.4GHZ_25.7MM]  162.43,29.78 270 top
E8  ANTENNATRACE  [TRACE_ANTENNA_2.4GHZ_25.7MM]  162.43,72.2 270 top
E9  ANTENNATRACE  [TRACE_ANTENNA_2.4GHZ_25.7MM]  162.43,114.62 270 top
E10  ANTENNATRACE  [TRACE_ANTENNA_2.4GHZ_25.7MM]  217.04,29.78 270 top
E11  ANTENNATRACE  [TRACE_ANTENNA_2.4GHZ_25.7MM]  217.04,72.2 270 top
E12  ANTENNATRACE  [TRACE_ANTENNA_2.4GHZ_25.7MM]  217.04,114.62 270 top
E13  ANTENNATRACE  [TRACE_ANTENNA_2.4GHZ_25.7MM]  271.65,29.78 270 top
E14  ANTENNATRACE  [TRACE_ANTENNA_2.4GHZ_25.7MM]  271.65,72.2 270 top
E15  ANTENNATRACE  [TRACE_ANTENNA_2.4GHZ_25.7MM]  271.65,114.62 270 top
E$1  [FIDUCIAL-1.5X3]  263.65,4.57 0 top
E$7  [FIDUCIAL-1X2]  266.95,135.25 90 top
E$8  [FIDUCIAL-1X2]  16,135.25 270 top
F1  500mA  [PTC-1206]  20.19,32.26 0 top
F2  500mA  [PTC-1206]  20.19,74.68 0 top
F3  500mA  [PTC-1206]  20.19,117.09 0 top
F4  500mA  [PTC-1206]  74.8,32.26 0 top
F5  500mA  [PTC-1206]  74.8,74.68 0 top
F6  500mA  [PTC-1206]  74.8,117.09 0 top
F7  500mA  [PTC-1206]  129.41,32.26 0 top
F8  500mA  [PTC-1206]  129.41,74.68 0 top
F9  500mA  [PTC-1206]  129.41,117.09 0 top
F10  500mA  [PTC-1206]  184.02,32.26 0 top
F11  500mA  [PTC-1206]  184.02,74.68 0 top
F12  500mA  [PTC-1206]  184.02,117.09 0 top
F13  500mA  [PTC-1206]  238.63,32.26 0 top
F14  500mA  [PTC-1206]  238.63,74.68 0 top
F15  500mA  [PTC-1206]  238.63,117.09 0 top
FID1  FIDUCIAL1X2  [FIDUCIAL-1X2]  51.31,11.94 0 top
FID2  FIDUCIAL1X2  [FIDUCIAL-1X2]  15.67,43.86 0 top
FID3  FIDUCIAL1X2  [FIDUCIAL-1X2]  51.31,54.36 0 top
FID4  FIDUCIAL1X2  [FIDUCIAL-1X2]  15.67,86.28 0 top
FID5  FIDUCIAL1X2  [FIDUCIAL-1X2]  51.31,96.77 0 top
FID6  FIDUCIAL1X2  [FIDUCIAL-1X2]  15.67,128.69 0 top
FID7  FIDUCIAL1X2  [FIDUCIAL-1X2]  105.92,11.94 0 top
FID8  FIDUCIAL1X2  [FIDUCIAL-1X2]  70.28,43.86 0 top
FID9  FIDUCIAL1X2  [FIDUCIAL-1X2]  105.92,54.36 0 top
FID10  FIDUCIAL1X2  [FIDUCIAL-1X2]  70.28,86.28 0 top
FID11  FIDUCIAL1X2  [FIDUCIAL-1X2]  105.92,96.77 0 top
FID12  FIDUCIAL1X2  [FIDUCIAL-1X2]  70.28,128.69 0 top
FID13  FIDUCIAL1X2  [FIDUCIAL-1X2]  160.53,11.94 0 top
FID14  FIDUCIAL1X2  [FIDUCIAL-1X2]  124.89,43.86 0 top
FID15  FIDUCIAL1X2  [FIDUCIAL-1X2]  160.53,54.36 0 top
FID16  FIDUCIAL1X2  [FIDUCIAL-1X2]  124.89,86.28 0 top
FID17  FIDUCIAL1X2  [FIDUCIAL-1X2]  160.53,96.77 0 top
FID18  FIDUCIAL1X2  [FIDUCIAL-1X2]  124.89,128.69 0 top
FID19  FIDUCIAL1X2  [FIDUCIAL-1X2]  215.14,11.94 0 top
FID20  FIDUCIAL1X2  [FIDUCIAL-1X2]  179.5,43.86 0 top
FID21  FIDUCIAL1X2  [FIDUCIAL-1X2]  215.14,54.36 0 top
FID22  FIDUCIAL1X2  [FIDUCIAL-1X2]  179.5,86.28 0 top
FID23  FIDUCIAL1X2  [FIDUCIAL-1X2]  215.14,96.77 0 top
FID24  FIDUCIAL1X2  [FIDUCIAL-1X2]  179.5,128.69 0 top
FID25  FIDUCIAL1X2  [FIDUCIAL-1X2]  269.75,11.94 0 top
FID26  FIDUCIAL1X2  [FIDUCIAL-1X2]  234.11,43.86 0 top
FID27  FIDUCIAL1X2  [FIDUCIAL-1X2]  269.75,54.36 0 top
FID28  FIDUCIAL1X2  [FIDUCIAL-1X2]  234.11,86.28 0 top
FID29  FIDUCIAL1X2  [FIDUCIAL-1X2]  269.75,96.77 0 top
FID30  FIDUCIAL1X2  [FIDUCIAL-1X2]  234.11,128.69 0 top
IC1  LMV358  [SO08]  32.89,37.97 270 top
IC2  LMV358  [SO08]  32.89,80.39 270 top
IC3  LMV358  [SO08]  32.89,122.81 270 top
IC4  LMV358  [SO08]  87.5,37.97 270 top
IC5  LMV358  [SO08]  87.5,80.39 270 top
IC6  LMV358  [SO08]  87.5,122.81 270 top
IC7  LMV358  [SO08]  142.11,37.97 270 top
IC8  LMV358  [SO08]  142.11,80.39 270 top
IC9  LMV358  [SO08]  142.11,122.81 270 top
IC10  LMV358  [SO08]  196.72,37.97 270 top
IC11  LMV358  [SO08]  196.72,80.39 270 top
IC12  LMV358  [SO08]  196.72,122.81 270 top
IC13  LMV358  [SO08]  251.33,37.97 270 top
IC14  LMV358  [SO08]  251.33,80.39 270 top
IC15  LMV358  [SO08]  251.33,122.81 270 top
JP1  LiPo  [JST-2-PTH]  17.02,19.56 90 top
JP2  [1X01_ALLIGATOR_3MM_HALF]  18.92,9.4 180 top
JP3  [1X01_NO_SILK]  18.92,13.84 0 top
JP4  [1X01_ALLIGATOR_3MM_HALF]  24,9.4 180 top
JP5  [1X01_NO_SILK]  24,13.84 0 top
JP6  [1X01_ALLIGATOR_3MM_HALF]  29.08,9.4 180 top
JP7  [1X01_NO_SILK]  29.08,13.84 0 top
JP8  [1X01_ALLIGATOR_3MM_HALF]  34.16,9.4 180 top
JP9  [1X01_NO_SILK]  34.16,13.84 0 top
JP10  [1X01_ALLIGATOR_3MM_HALF]  39.24,9.4 180 top
JP11  [1X01_NO_SILK]  39.24,13.84 0 top
JP12  [1X01_ALLIGATOR_3MM_HALF]  44.32,9.4 180 top
JP13  [1X01_NO_SILK]  44.32,13.84 0 top
JP14  [JST-3-PTH-VERT]  49.28,16.76 0 top
JP15  [USB-B-MICRO-SMD_V03]  12.7,27.81 0 top
JP16  [1X01_ALLIGATOR_3MM_HALF]  18.92,46.23 0 top
JP17  [1X01_NO_SILK]  18.92,41.78 0 top
JP18  [1X01_ALLIGATOR_3MM_HALF]  24,46.23 0 top
JP19  [1X01_NO_SILK]  24,41.78 0 top
JP20  [1X01_ALLIGATOR_3MM_HALF]  29.08,46.23 0 top
JP21  [1X01_NO_SILK]  29.08,41.78 0 top
JP22  [1X01_ALLIGATOR_3MM_HALF]  34.16,46.23 0 top
JP23  [1X01_NO_SILK]  34.16,41.78 0 top
JP24  [1X01_ALLIGATOR_3MM_HALF]  39.24,46.23 0 top
JP25  [1X01_NO_SILK]  39.24,41.78 0 top
JP26  [1X01_ALLIGATOR_3MM_HALF]  44.32,46.23 0 top
JP27  [1X01_NO_SILK]  44.32,41.78 0 top
JP28  [1X01_NO_SILK]  41.78,41.78 0 top
JP29  [JST-4-PTH-VERT]  15.49,38.23 90 top
JP30  [1X04_NO_SILK]  11.94,34.8 90 top
JP31  [USB-B-MICRO-SMD_V03]  12.7,70.23 0 top
JP32  [1X01_ALLIGATOR_3MM_HALF]  18.92,88.65 0 top
JP33  [1X01_ALLIGATOR_3MM_HALF]  24,88.65 0 top
JP34  [1X01_ALLIGATOR_3MM_HALF]  34.16,88.65 0 top
JP35  [1X01_ALLIGATOR_3MM_HALF]  39.24,88.65 0 top
JP36  [1X01_ALLIGATOR_3MM_HALF]  44.32,51.82 180 top
JP37  [1X01_ALLIGATOR_3MM_HALF]  29.08,88.65 0 top
JP38  [1X01_ALLIGATOR_3MM_HALF]  24,51.82 180 top
JP39  [1X01_ALLIGATOR_3MM_HALF]  29.08,51.82 180 top
JP40  [JST-3-PTH-VERT]  49.28,59.18 0 top
JP41  [1X01_NO_SILK]  44.32,56.26 0 top
JP42  [1X01_NO_SILK]  29.08,84.2 0 top
JP43  [1X01_NO_SILK]  24,56.26 0 top
JP44  [1X01_NO_SILK]  29.08,56.26 0 top
JP45  [1X01_NO_SILK]  39.24,84.2 0 top
JP46  [1X01_NO_SILK]  34.16,84.2 0 top
JP47  [1X01_NO_SILK]  24,84.2 0 top
JP48  [1X01_NO_SILK]  18.92,84.2 0 top
JP49  LiPo  [JST-2-PTH]  17.02,61.98 90 top
JP50  [1X01_NO_SILK]  41.78,84.2 0 top
JP51  [1X01_ALLIGATOR_3MM_HALF]  39.24,51.82 180 top
JP52  [1X01_NO_SILK]  39.24,56.26 0 top
JP53  [1X01_ALLIGATOR_3MM_HALF]  34.16,51.82 180 top
JP54  [1X01_NO_SILK]  34.16,56.26 0 top
JP55  [1X01_ALLIGATOR_3MM_HALF]  44.32,88.65 0 top
JP56  [1X01_NO_SILK]  44.32,84.2 0 top
JP57  [1X01_ALLIGATOR_3MM_HALF]  18.92,51.82 180 top
JP58  [1X01_NO_SILK]  18.92,56.26 0 top
JP59  [1X04_NO_SILK]  11.94,77.22 90 top
JP60  [JST-4-PTH-VERT]  15.49,80.64 90 top
JP61  [USB-B-MICRO-SMD_V03]  12.7,112.65 0 top
JP62  [1X01_ALLIGATOR_3MM_HALF]  18.92,131.06 0 top
JP63  [1X01_ALLIGATOR_3MM_HALF]  24,131.06 0 top
JP64  [1X01_ALLIGATOR_3MM_HALF]  34.16,131.06 0 top
JP65  [1X01_ALLIGATOR_3MM_HALF]  39.24,131.06 0 top
JP66  [1X01_ALLIGATOR_3MM_HALF]  44.32,94.23 180 top
JP67  [1X01_ALLIGATOR_3MM_HALF]  29.08,131.06 0 top
JP68  [1X01_ALLIGATOR_3MM_HALF]  24,94.23 180 top
JP69  [1X01_ALLIGATOR_3MM_HALF]  29.08,94.23 180 top
JP70  [JST-3-PTH-VERT]  49.28,101.6 0 top
JP71  [1X01_NO_SILK]  44.32,98.68 0 top
JP72  [1X01_NO_SILK]  29.08,126.62 0 top
JP73  [1X01_NO_SILK]  24,98.68 0 top
JP74  [1X01_NO_SILK]  29.08,98.68 0 top
JP75  [1X01_NO_SILK]  39.24,126.62 0 top
JP76  [1X01_NO_SILK]  34.16,126.62 0 top
JP77  [1X01_NO_SILK]  24,126.62 0 top
JP78  [1X01_NO_SILK]  18.92,126.62 0 top
JP79  LiPo  [JST-2-PTH]  17.02,104.39 90 top
JP80  [1X01_NO_SILK]  41.78,126.62 0 top
JP81  [1X01_ALLIGATOR_3MM_HALF]  39.24,94.23 180 top
JP82  [1X01_NO_SILK]  39.24,98.68 0 top
JP83  [1X01_ALLIGATOR_3MM_HALF]  34.16,94.23 180 top
JP84  [1X01_NO_SILK]  34.16,98.68 0 top
JP85  [1X01_ALLIGATOR_3MM_HALF]  44.32,131.06 0 top
JP86  [1X01_NO_SILK]  44.32,126.62 0 top
JP87  [1X01_ALLIGATOR_3MM_HALF]  18.92,94.23 180 top
JP88  [1X01_NO_SILK]  18.92,98.68 0 top
JP89  [1X04_NO_SILK]  11.94,119.63 90 top
JP90  [JST-4-PTH-VERT]  15.49,123.06 90 top
JP91  [USB-B-MICRO-SMD_V03]  67.31,27.81 0 top
JP92  [1X01_ALLIGATOR_3MM_HALF]  73.53,46.23 0 top
JP93  [1X01_ALLIGATOR_3MM_HALF]  78.61,46.23 0 top
JP94  [1X01_ALLIGATOR_3MM_HALF]  88.77,46.23 0 top
JP95  [1X01_ALLIGATOR_3MM_HALF]  93.85,46.23 0 top
JP96  [1X01_ALLIGATOR_3MM_HALF]  98.93,9.4 180 top
JP97  [1X01_ALLIGATOR_3MM_HALF]  83.69,46.23 0 top
JP98  [1X01_ALLIGATOR_3MM_HALF]  78.61,9.4 180 top
JP99  [1X01_ALLIGATOR_3MM_HALF]  83.69,9.4 180 top
JP100  [JST-3-PTH-VERT]  103.89,16.76 0 top
JP101  [1X01_NO_SILK]  98.93,13.84 0 top
JP102  [1X01_NO_SILK]  83.69,41.78 0 top
JP103  [1X01_NO_SILK]  78.61,13.84 0 top
JP104  [1X01_NO_SILK]  83.69,13.84 0 top
JP105  [1X01_NO_SILK]  93.85,41.78 0 top
JP106  [1X01_NO_SILK]  88.77,41.78 0 top
JP107  [1X01_NO_SILK]  78.61,41.78 0 top
JP108  [1X01_NO_SILK]  73.53,41.78 0 top
JP109  LiPo  [JST-2-PTH]  71.63,19.56 90 top
JP110  [1X01_NO_SILK]  96.39,41.78 0 top
JP111  [1X01_ALLIGATOR_3MM_HALF]  93.85,9.4 180 top
JP112  [1X01_NO_SILK]  93.85,13.84 0 top
JP113  [1X01_ALLIGATOR_3MM_HALF]  88.77,9.4 180 top
JP114  [1X01_NO_SILK]  88.77,13.84 0 top
JP115  [1X01_ALLIGATOR_3MM_HALF]  98.93,46.23 0 top
JP116  [1X01_NO_SILK]  98.93,41.78 0 top
JP117  [1X01_ALLIGATOR_3MM_HALF]  73.53,9.4 180 top
JP118  [1X01_NO_SILK]  73.53,13.84 0 top
JP119  [1X04_NO_SILK]  66.55,34.8 90 top
JP120  [JST-4-PTH-VERT]  70.1,38.23 90 top
JP121  [USB-B-MICRO-SMD_V03]  67.31,70.23 0 top
JP122  [1X01_ALLIGATOR_3MM_HALF]  73.53,88.65 0 top
JP123  [1X01_ALLIGATOR_3MM_HALF]  78.61,88.65 0 top
JP124  [1X01_ALLIGATOR_3MM_HALF]  88.77,88.65 0 top
JP125  [1X01_ALLIGATOR_3MM_HALF]  93.85,88.65 0 top
JP126  [1X01_ALLIGATOR_3MM_HALF]  98.93,51.82 180 top
JP127  [1X01_ALLIGATOR_3MM_HALF]  83.69,88.65 0 top
JP128  [1X01_ALLIGATOR_3MM_HALF]  78.61,51.82 180 top
JP129  [1X01_ALLIGATOR_3MM_HALF]  83.69,51.82 180 top
JP130  [JST-3-PTH-VERT]  103.89,59.18 0 top
JP131  [1X01_NO_SILK]  98.93,56.26 0 top
JP132  [1X01_NO_SILK]  83.69,84.2 0 top
JP133  [1X01_NO_SILK]  78.61,56.26 0 top
JP134  [1X01_NO_SILK]  83.69,56.26 0 top
JP135  [1X01_NO_SILK]  93.85,84.2 0 top
JP136  [1X01_NO_SILK]  88.77,84.2 0 top
JP137  [1X01_NO_SILK]  78.61,84.2 0 top
JP138  [1X01_NO_SILK]  73.53,84.2 0 top
JP139  LiPo  [JST-2-PTH]  71.63,61.98 90 top
JP140  [1X01_NO_SILK]  96.39,84.2 0 top
JP141  [1X01_ALLIGATOR_3MM_HALF]  93.85,51.82 180 top
JP142  [1X01_NO_SILK]  93.85,56.26 0 top
JP143  [1X01_ALLIGATOR_3MM_HALF]  88.77,51.82 180 top
JP144  [1X01_NO_SILK]  88.77,56.26 0 top
JP145  [1X01_ALLIGATOR_3MM_HALF]  98.93,88.65 0 top
JP146  [1X01_NO_SILK]  98.93,84.2 0 top
JP147  [1X01_ALLIGATOR_3MM_HALF]  73.53,51.82 180 top
JP148  [1X01_NO_SILK]  73.53,56.26 0 top
JP149  [1X04_NO_SILK]  66.55,77.22 90 top
JP150  [JST-4-PTH-VERT]  70.1,80.64 90 top
JP151  [USB-B-MICRO-SMD_V03]  67.31,112.65 0 top
JP152  [1X01_ALLIGATOR_3MM_HALF]  73.53,131.06 0 top
JP153  [1X01_ALLIGATOR_3MM_HALF]  78.61,131.06 0 top
JP154  [1X01_ALLIGATOR_3MM_HALF]  88.77,131.06 0 top
JP155  [1X01_ALLIGATOR_3MM_HALF]  93.85,131.06 0 top
JP156  [1X01_ALLIGATOR_3MM_HALF]  98.93,94.23 180 top
JP157  [1X01_ALLIGATOR_3MM_HALF]  83.69,131.06 0 top
JP158  [1X01_ALLIGATOR_3MM_HALF]  78.61,94.23 180 top
JP159  [1X01_ALLIGATOR_3MM_HALF]  83.69,94.23 180 top
JP160  [JST-3-PTH-VERT]  103.89,101.6 0 top
JP161  [1X01_NO_SILK]  98.93,98.68 0 top
JP162  [1X01_NO_SILK]  83.69,126.62 0 top
JP163  [1X01_NO_SILK]  78.61,98.68 0 top
JP164  [1X01_NO_SILK]  83.69,98.68 0 top
JP165  [1X01_NO_SILK]  93.85,126.62 0 top
JP166  [1X01_NO_SILK]  88.77,126.62 0 top
JP167  [1X01_NO_SILK]  78.61,126.62 0 top
JP168  [1X01_NO_SILK]  73.53,126.62 0 top
JP169  LiPo  [JST-2-PTH]  71.63,104.39 90 top
JP170  [1X01_NO_SILK]  96.39,126.62 0 top
JP171  [1X01_ALLIGATOR_3MM_HALF]  93.85,94.23 180 top
JP172  [1X01_NO_SILK]  93.85,98.68 0 top
JP173  [1X01_ALLIGATOR_3MM_HALF]  88.77,94.23 180 top
JP174  [1X01_NO_SILK]  88.77,98.68 0 top
JP175  [1X01_ALLIGATOR_3MM_HALF]  98.93,131.06 0 top
JP176  [1X01_NO_SILK]  98.93,126.62 0 top
JP177  [1X01_ALLIGATOR_3MM_HALF]  73.53,94.23 180 top
JP178  [1X01_NO_SILK]  73.53,98.68 0 top
JP179  [1X04_NO_SILK]  66.55,119.63 90 top
JP180  [JST-4-PTH-VERT]  70.1,123.06 90 top
JP181  [USB-B-MICRO-SMD_V03]  121.92,27.81 0 top
JP182  [1X01_ALLIGATOR_3MM_HALF]  128.14,46.23 0 top
JP183  [1X01_ALLIGATOR_3MM_HALF]  133.22,46.23 0 top
JP184  [1X01_ALLIGATOR_3MM_HALF]  143.38,46.23 0 top
JP185  [1X01_ALLIGATOR_3MM_HALF]  148.46,46.23 0 top
JP186  [1X01_ALLIGATOR_3MM_HALF]  153.54,9.4 180 top
JP187  [1X01_ALLIGATOR_3MM_HALF]  138.3,46.23 0 top
JP188  [1X01_ALLIGATOR_3MM_HALF]  133.22,9.4 180 top
JP189  [1X01_ALLIGATOR_3MM_HALF]  138.3,9.4 180 top
JP190  [JST-3-PTH-VERT]  158.5,16.76 0 top
JP191  [1X01_NO_SILK]  153.54,13.84 0 top
JP192  [1X01_NO_SILK]  138.3,41.78 0 top
JP193  [1X01_NO_SILK]  133.22,13.84 0 top
JP194  [1X01_NO_SILK]  138.3,13.84 0 top
JP195  [1X01_NO_SILK]  148.46,41.78 0 top
JP196  [1X01_NO_SILK]  143.38,41.78 0 top
JP197  [1X01_NO_SILK]  133.22,41.78 0 top
JP198  [1X01_NO_SILK]  128.14,41.78 0 top
JP199  LiPo  [JST-2-PTH]  126.24,19.56 90 top
JP200  [1X01_NO_SILK]  151,41.78 0 top
JP201  [1X01_ALLIGATOR_3MM_HALF]  148.46,9.4 180 top
JP202  [1X01_NO_SILK]  148.46,13.84 0 top
JP203  [1X01_ALLIGATOR_3MM_HALF]  143.38,9.4 180 top
JP204  [1X01_NO_SILK]  143.38,13.84 0 top
JP205  [1X01_ALLIGATOR_3MM_HALF]  153.54,46.23 0 top
JP206  [1X01_NO_SILK]  153.54,41.78 0 top
JP207  [1X01_ALLIGATOR_3MM_HALF]  128.14,9.4 180 top
JP208  [1X01_NO_SILK]  128.14,13.84 0 top
JP209  [1X04_NO_SILK]  121.16,34.8 90 top
JP210  [JST-4-PTH-VERT]  124.71,38.23 90 top
JP211  [USB-B-MICRO-SMD_V03]  121.92,70.23 0 top
JP212  [1X01_ALLIGATOR_3MM_HALF]  128.14,88.65 0 top
JP213  [1X01_ALLIGATOR_3MM_HALF]  133.22,88.65 0 top
JP214  [1X01_ALLIGATOR_3MM_HALF]  143.38,88.65 0 top
JP215  [1X01_ALLIGATOR_3MM_HALF]  148.46,88.65 0 top
JP216  [1X01_ALLIGATOR_3MM_HALF]  153.54,51.82 180 top
JP217  [1X01_ALLIGATOR_3MM_HALF]  138.3,88.65 0 top
JP218  [1X01_ALLIGATOR_3MM_HALF]  133.22,51.82 180 top
JP219  [1X01_ALLIGATOR_3MM_HALF]  138.3,51.82 180 top
JP220  [JST-3-PTH-VERT]  158.5,59.18 0 top
JP221  [1X01_NO_SILK]  153.54,56.26 0 top
JP222  [1X01_NO_SILK]  138.3,84.2 0 top
JP223  [1X01_NO_SILK]  133.22,56.26 0 top
JP224  [1X01_NO_SILK]  138.3,56.26 0 top
JP225  [1X01_NO_SILK]  148.46,84.2 0 top
JP226  [1X01_NO_SILK]  143.38,84.2 0 top
JP227  [1X01_NO_SILK]  133.22,84.2 0 top
JP228  [1X01_NO_SILK]  128.14,84.2 0 top
JP229  LiPo  [JST-2-PTH]  126.24,61.98 90 top
JP230  [1X01_NO_SILK]  151,84.2 0 top
JP231  [1X01_ALLIGATOR_3MM_HALF]  148.46,51.82 180 top
JP232  [1X01_NO_SILK]  148.46,56.26 0 top
JP233  [1X01_ALLIGATOR_3MM_HALF]  143.38,51.82 180 top
JP234  [1X01_NO_SILK]  143.38,56.26 0 top
JP235  [1X01_ALLIGATOR_3MM_HALF]  153.54,88.65 0 top
JP236  [1X01_NO_SILK]  153.54,84.2 0 top
JP237  [1X01_ALLIGATOR_3MM_HALF]  128.14,51.82 180 top
JP238  [1X01_NO_SILK]  128.14,56.26 0 top
JP239  [1X04_NO_SILK]  121.16,77.22 90 top
JP240  [JST-4-PTH-VERT]  124.71,80.64 90 top
JP241  [USB-B-MICRO-SMD_V03]  121.92,112.65 0 top
JP242  [1X01_ALLIGATOR_3MM_HALF]  128.14,131.06 0 top
JP243  [1X01_ALLIGATOR_3MM_HALF]  133.22,131.06 0 top
JP244  [1X01_ALLIGATOR_3MM_HALF]  143.38,131.06 0 top
JP245  [1X01_ALLIGATOR_3MM_HALF]  148.46,131.06 0 top
JP246  [1X01_ALLIGATOR_3MM_HALF]  153.54,94.23 180 top
JP247  [1X01_ALLIGATOR_3MM_HALF]  138.3,131.06 0 top
JP248  [1X01_ALLIGATOR_3MM_HALF]  133.22,94.23 180 top
JP249  [1X01_ALLIGATOR_3MM_HALF]  138.3,94.23 180 top
JP250  [JST-3-PTH-VERT]  158.5,101.6 0 top
JP251  [1X01_NO_SILK]  153.54,98.68 0 top
JP252  [1X01_NO_SILK]  138.3,126.62 0 top
JP253  [1X01_NO_SILK]  133.22,98.68 0 top
JP254  [1X01_NO_SILK]  138.3,98.68 0 top
JP255  [1X01_NO_SILK]  148.46,126.62 0 top
JP256  [1X01_NO_SILK]  143.38,126.62 0 top
JP257  [1X01_NO_SILK]  133.22,126.62 0 top
JP258  [1X01_NO_SILK]  128.14,126.62 0 top
JP259  LiPo  [JST-2-PTH]  126.24,104.39 90 top
JP260  [1X01_NO_SILK]  151,126.62 0 top
JP261  [1X01_ALLIGATOR_3MM_HALF]  148.46,94.23 180 top
JP262  [1X01_NO_SILK]  148.46,98.68 0 top
JP263  [1X01_ALLIGATOR_3MM_HALF]  143.38,94.23 180 top
JP264  [1X01_NO_SILK]  143.38,98.68 0 top
JP265  [1X01_ALLIGATOR_3MM_HALF]  153.54,131.06 0 top
JP266  [1X01_NO_SILK]  153.54,126.62 0 top
JP267  [1X01_ALLIGATOR_3MM_HALF]  128.14,94.23 180 top
JP268  [1X01_NO_SILK]  128.14,98.68 0 top
JP269  [1X04_NO_SILK]  121.16,119.63 90 top
JP270  [JST-4-PTH-VERT]  124.71,123.06 90 top
JP271  [USB-B-MICRO-SMD_V03]  176.53,27.81 0 top
JP272  [1X01_ALLIGATOR_3MM_HALF]  182.75,46.23 0 top
JP273  [1X01_ALLIGATOR_3MM_HALF]  187.83,46.23 0 top
JP274  [1X01_ALLIGATOR_3MM_HALF]  197.99,46.23 0 top
JP275  [1X01_ALLIGATOR_3MM_HALF]  203.07,46.23 0 top
JP276  [1X01_ALLIGATOR_3MM_HALF]  208.15,9.4 180 top
JP277  [1X01_ALLIGATOR_3MM_HALF]  192.91,46.23 0 top
JP278  [1X01_ALLIGATOR_3MM_HALF]  187.83,9.4 180 top
JP279  [1X01_ALLIGATOR_3MM_HALF]  192.91,9.4 180 top
JP280  [JST-3-PTH-VERT]  213.11,16.76 0 top
JP281  [1X01_NO_SILK]  208.15,13.84 0 top
JP282  [1X01_NO_SILK]  192.91,41.78 0 top
JP283  [1X01_NO_SILK]  187.83,13.84 0 top
JP284  [1X01_NO_SILK]  192.91,13.84 0 top
JP285  [1X01_NO_SILK]  203.07,41.78 0 top
JP286  [1X01_NO_SILK]  197.99,41.78 0 top
JP287  [1X01_NO_SILK]  187.83,41.78 0 top
JP288  [1X01_NO_SILK]  182.75,41.78 0 top
JP289  LiPo  [JST-2-PTH]  180.85,19.56 90 top
JP290  [1X01_NO_SILK]  205.61,41.78 0 top
JP291  [1X01_ALLIGATOR_3MM_HALF]  203.07,9.4 180 top
JP292  [1X01_NO_SILK]  203.07,13.84 0 top
JP293  [1X01_ALLIGATOR_3MM_HALF]  197.99,9.4 180 top
JP294  [1X01_NO_SILK]  197.99,13.84 0 top
JP295  [1X01_ALLIGATOR_3MM_HALF]  208.15,46.23 0 top
JP296  [1X01_NO_SILK]  208.15,41.78 0 top
JP297  [1X01_ALLIGATOR_3MM_HALF]  182.75,9.4 180 top
JP298  [1X01_NO_SILK]  182.75,13.84 0 top
JP299  [1X04_NO_SILK]  175.77,34.8 90 top
JP300  [JST-4-PTH-VERT]  179.32,38.23 90 top
JP301  [USB-B-MICRO-SMD_V03]  176.53,70.23 0 top
JP302  [1X01_ALLIGATOR_3MM_HALF]  182.75,88.65 0 top
JP303  [1X01_ALLIGATOR_3MM_HALF]  187.83,88.65 0 top
JP304  [1X01_ALLIGATOR_3MM_HALF]  197.99,88.65 0 top
JP305  [1X01_ALLIGATOR_3MM_HALF]  203.07,88.65 0 top
JP306  [1X01_ALLIGATOR_3MM_HALF]  208.15,51.82 180 top
JP307  [1X01_ALLIGATOR_3MM_HALF]  192.91,88.65 0 top
JP308  [1X01_ALLIGATOR_3MM_HALF]  187.83,51.82 180 top
JP309  [1X01_ALLIGATOR_3MM_HALF]  192.91,51.82 180 top
JP310  [JST-3-PTH-VERT]  213.11,59.18 0 top
JP311  [1X01_NO_SILK]  208.15,56.26 0 top
JP312  [1X01_NO_SILK]  192.91,84.2 0 top
JP313  [1X01_NO_SILK]  187.83,56.26 0 top
JP314  [1X01_NO_SILK]  192.91,56.26 0 top
JP315  [1X01_NO_SILK]  203.07,84.2 0 top
JP316  [1X01_NO_SILK]  197.99,84.2 0 top
JP317  [1X01_NO_SILK]  187.83,84.2 0 top
JP318  [1X01_NO_SILK]  182.75,84.2 0 top
JP319  LiPo  [JST-2-PTH]  180.85,61.98 90 top
JP320  [1X01_NO_SILK]  205.61,84.2 0 top
JP321  [1X01_ALLIGATOR_3MM_HALF]  203.07,51.82 180 top
JP322  [1X01_NO_SILK]  203.07,56.26 0 top
JP323  [1X01_ALLIGATOR_3MM_HALF]  197.99,51.82 180 top
JP324  [1X01_NO_SILK]  197.99,56.26 0 top
JP325  [1X01_ALLIGATOR_3MM_HALF]  208.15,88.65 0 top
JP326  [1X01_NO_SILK]  208.15,84.2 0 top
JP327  [1X01_ALLIGATOR_3MM_HALF]  182.75,51.82 180 top
JP328  [1X01_NO_SILK]  182.75,56.26 0 top
JP329  [1X04_NO_SILK]  175.77,77.22 90 top
JP330  [JST-4-PTH-VERT]  179.32,80.64 90 top
JP331  [USB-B-MICRO-SMD_V03]  176.53,112.65 0 top
JP332  [1X01_ALLIGATOR_3MM_HALF]  182.75,131.06 0 top
JP333  [1X01_ALLIGATOR_3MM_HALF]  187.83,131.06 0 top
JP334  [1X01_ALLIGATOR_3MM_HALF]  197.99,131.06 0 top
JP335  [1X01_ALLIGATOR_3MM_HALF]  203.07,131.06 0 top
JP336  [1X01_ALLIGATOR_3MM_HALF]  208.15,94.23 180 top
JP337  [1X01_ALLIGATOR_3MM_HALF]  192.91,131.06 0 top
JP338  [1X01_ALLIGATOR_3MM_HALF]  187.83,94.23 180 top
JP339  [1X01_ALLIGATOR_3MM_HALF]  192.91,94.23 180 top
JP340  [JST-3-PTH-VERT]  213.11,101.6 0 top
JP341  [1X01_NO_SILK]  208.15,98.68 0 top
JP342  [1X01_NO_SILK]  192.91,126.62 0 top
JP343  [1X01_NO_SILK]  187.83,98.68 0 top
JP344  [1X01_NO_SILK]  192.91,98.68 0 top
JP345  [1X01_NO_SILK]  203.07,126.62 0 top
JP346  [1X01_NO_SILK]  197.99,126.62 0 top
JP347  [1X01_NO_SILK]  187.83,126.62 0 top
JP348  [1X01_NO_SILK]  182.75,126.62 0 top
JP349  LiPo  [JST-2-PTH]  180.85,104.39 90 top
JP350  [1X01_NO_SILK]  205.61,126.62 0 top
JP351  [1X01_ALLIGATOR_3MM_HALF]  203.07,94.23 180 top
JP352  [1X01_NO_SILK]  203.07,98.68 0 top
JP353  [1X01_ALLIGATOR_3MM_HALF]  197.99,94.23 180 top
JP354  [1X01_NO_SILK]  197.99,98.68 0 top
JP355  [1X01_ALLIGATOR_3MM_HALF]  208.15,131.06 0 top
JP356  [1X01_NO_SILK]  208.15,126.62 0 top
JP357  [1X01_ALLIGATOR_3MM_HALF]  182.75,94.23 180 top
JP358  [1X01_NO_SILK]  182.75,98.68 0 top
JP359  [1X04_NO_SILK]  175.77,119.63 90 top
JP360  [JST-4-PTH-VERT]  179.32,123.06 90 top
JP361  [USB-B-MICRO-SMD_V03]  231.14,27.81 0 top
JP362  [1X01_ALLIGATOR_3MM_HALF]  237.36,46.23 0 top
JP363  [1X01_ALLIGATOR_3MM_HALF]  242.44,46.23 0 top
JP364  [1X01_ALLIGATOR_3MM_HALF]  252.6,46.23 0 top
JP365  [1X01_ALLIGATOR_3MM_HALF]  257.68,46.23 0 top
JP366  [1X01_ALLIGATOR_3MM_HALF]  262.76,9.4 180 top
JP367  [1X01_ALLIGATOR_3MM_HALF]  247.52,46.23 0 top
JP368  [1X01_ALLIGATOR_3MM_HALF]  242.44,9.4 180 top
JP369  [1X01_ALLIGATOR_3MM_HALF]  247.52,9.4 180 top
JP370  [JST-3-PTH-VERT]  267.72,16.76 0 top
JP371  [1X01_NO_SILK]  262.76,13.84 0 top
JP372  [1X01_NO_SILK]  247.52,41.78 0 top
JP373  [1X01_NO_SILK]  242.44,13.84 0 top
JP374  [1X01_NO_SILK]  247.52,13.84 0 top
JP375  [1X01_NO_SILK]  257.68,41.78 0 top
JP376  [1X01_NO_SILK]  252.6,41.78 0 top
JP377  [1X01_NO_SILK]  242.44,41.78 0 top
JP378  [1X01_NO_SILK]  237.36,41.78 0 top
JP379  LiPo  [JST-2-PTH]  235.46,19.56 90 top
JP380  [1X01_NO_SILK]  260.22,41.78 0 top
JP381  [1X01_ALLIGATOR_3MM_HALF]  257.68,9.4 180 top
JP382  [1X01_NO_SILK]  257.68,13.84 0 top
JP383  [1X01_ALLIGATOR_3MM_HALF]  252.6,9.4 180 top
JP384  [1X01_NO_SILK]  252.6,13.84 0 top
JP385  [1X01_ALLIGATOR_3MM_HALF]  262.76,46.23 0 top
JP386  [1X01_NO_SILK]  262.76,41.78 0 top
JP387  [1X01_ALLIGATOR_3MM_HALF]  237.36,9.4 180 top
JP388  [1X01_NO_SILK]  237.36,13.84 0 top
JP389  [1X04_NO_SILK]  230.38,34.8 90 top
JP390  [JST-4-PTH-VERT]  233.93,38.23 90 top
JP391  [USB-B-MICRO-SMD_V03]  231.14,70.23 0 top
JP392  [1X01_ALLIGATOR_3MM_HALF]  237.36,88.65 0 top
JP393  [1X01_ALLIGATOR_3MM_HALF]  242.44,88.65 0 top
JP394  [1X01_ALLIGATOR_3MM_HALF]  252.6,88.65 0 top
JP395  [1X01_ALLIGATOR_3MM_HALF]  257.68,88.65 0 top
JP396  [1X01_ALLIGATOR_3MM_HALF]  262.76,51.82 180 top
JP397  [1X01_ALLIGATOR_3MM_HALF]  247.52,88.65 0 top
JP398  [1X01_ALLIGATOR_3MM_HALF]  242.44,51.82 180 top
JP399  [1X01_ALLIGATOR_3MM_HALF]  247.52,51.82 180 top
JP400  [JST-3-PTH-VERT]  267.72,59.18 0 top
JP401  [1X01_NO_SILK]  262.76,56.26 0 top
JP402  [1X01_NO_SILK]  247.52,84.2 0 top
JP403  [1X01_NO_SILK]  242.44,56.26 0 top
JP404  [1X01_NO_SILK]  247.52,56.26 0 top
JP405  [1X01_NO_SILK]  257.68,84.2 0 top
JP406  [1X01_NO_SILK]  252.6,84.2 0 top
JP407  [1X01_NO_SILK]  242.44,84.2 0 top
JP408  [1X01_NO_SILK]  237.36,84.2 0 top
JP409  LiPo  [JST-2-PTH]  235.46,61.98 90 top
JP410  [1X01_NO_SILK]  260.22,84.2 0 top
JP411  [1X01_ALLIGATOR_3MM_HALF]  257.68,51.82 180 top
JP412  [1X01_NO_SILK]  257.68,56.26 0 top
JP413  [1X01_ALLIGATOR_3MM_HALF]  252.6,51.82 180 top
JP414  [1X01_NO_SILK]  252.6,56.26 0 top
JP415  [1X01_ALLIGATOR_3MM_HALF]  262.76,88.65 0 top
JP416  [1X01_NO_SILK]  262.76,84.2 0 top
JP417  [1X01_ALLIGATOR_3MM_HALF]  237.36,51.82 180 top
JP418  [1X01_NO_SILK]  237.36,56.26 0 top
JP419  [1X04_NO_SILK]  230.38,77.22 90 top
JP420  [JST-4-PTH-VERT]  233.93,80.64 90 top
JP421  [USB-B-MICRO-SMD_V03]  231.14,112.65 0 top
JP422  [1X01_ALLIGATOR_3MM_HALF]  237.36,131.06 0 top
JP423  [1X01_ALLIGATOR_3MM_HALF]  242.44,131.06 0 top
JP424  [1X01_ALLIGATOR_3MM_HALF]  252.6,131.06 0 top
JP425  [1X01_ALLIGATOR_3MM_HALF]  257.68,131.06 0 top
JP426  [1X01_ALLIGATOR_3MM_HALF]  262.76,94.23 180 top
JP427  [1X01_ALLIGATOR_3MM_HALF]  247.52,131.06 0 top
JP428  [1X01_ALLIGATOR_3MM_HALF]  242.44,94.23 180 top
JP429  [1X01_ALLIGATOR_3MM_HALF]  247.52,94.23 180 top
JP430  [JST-3-PTH-VERT]  267.72,101.6 0 top
JP431  [1X01_NO_SILK]  262.76,98.68 0 top
JP432  [1X01_NO_SILK]  247.52,126.62 0 top
JP433  [1X01_NO_SILK]  242.44,98.68 0 top
JP434  [1X01_NO_SILK]  247.52,98.68 0 top
JP435  [1X01_NO_SILK]  257.68,126.62 0 top
JP436  [1X01_NO_SILK]  252.6,126.62 0 top
JP437  [1X01_NO_SILK]  242.44,126.62 0 top
JP438  [1X01_NO_SILK]  237.36,126.62 0 top
JP439  LiPo  [JST-2-PTH]  235.46,104.39 90 top
JP440  [1X01_NO_SILK]  260.22,126.62 0 top
JP441  [1X01_ALLIGATOR_3MM_HALF]  257.68,94.23 180 top
JP442  [1X01_NO_SILK]  257.68,98.68 0 top
JP443  [1X01_ALLIGATOR_3MM_HALF]  252.6,94.23 180 top
JP444  [1X01_NO_SILK]  252.6,98.68 0 top
JP445  [1X01_ALLIGATOR_3MM_HALF]  262.76,131.06 0 top
JP446  [1X01_NO_SILK]  262.76,126.62 0 top
JP447  [1X01_ALLIGATOR_3MM_HALF]  237.36,94.23 180 top
JP448  [1X01_NO_SILK]  237.36,98.68 0 top
JP449  [1X04_NO_SILK]  230.38,119.63 90 top
JP450  [JST-4-PTH-VERT]  233.93,123.06 90 top
L1  DNP  [0603]  45.59,28.89 270 top
L2  DNP  [0603]  50.67,28.89 270 top
L3  DNP  [0603]  45.59,71.31 270 top
L4  DNP  [0603]  50.67,71.31 270 top
L5  DNP  [0603]  45.59,113.73 270 top
L6  DNP  [0603]  50.67,113.73 270 top
L7  DNP  [0603]  100.2,28.89 270 top
L8  DNP  [0603]  105.28,28.89 270 top
L9  DNP  [0603]  100.2,71.31 270 top
L10  DNP  [0603]  105.28,71.31 270 top
L11  DNP  [0603]  100.2,113.73 270 top
L12  DNP  [0603]  105.28,113.73 270 top
L13  DNP  [0603]  154.81,28.89 270 top
L14  DNP  [0603]  159.89,28.89 270 top
L15  DNP  [0603]  154.81,71.31 270 top
L16  DNP  [0603]  159.89,71.31 270 top
L17  DNP  [0603]  154.81,113.73 270 top
L18  DNP  [0603]  159.89,113.73 270 top
L19  DNP  [0603]  209.42,28.89 270 top
L20  DNP  [0603]  214.5,28.89 270 top
L21  DNP  [0603]  209.42,71.31 270 top
L22  DNP  [0603]  214.5,71.31 270 top
L23  DNP  [0603]  209.42,113.73 270 top
L24  DNP  [0603]  214.5,113.73 270 top
L25  DNP  [0603]  264.03,28.89 270 top
L26  DNP  [0603]  269.11,28.89 270 top
L27  DNP  [0603]  264.03,71.31 270 top
L28  DNP  [0603]  269.11,71.31 270 top
L29  DNP  [0603]  264.03,113.73 270 top
L30  DNP  [0603]  269.11,113.73 270 top
LOGO1  SFE_LOGO_NAME.2_INCH  [SFE_LOGO_NAME_.2]  58.29,16.83 90 top
LOGO2  OSHW-LOGOS  [OSHW-LOGO-S]  50.04,32.89 90 top
LOGO3  SFE_LOGO_NAME.2_INCH  [SFE_LOGO_NAME_.2]  58.29,59.25 90 top
LOGO4  OSHW-LOGOS  [OSHW-LOGO-S]  50.04,75.31 90 top
LOGO5  SFE_LOGO_NAME.2_INCH  [SFE_LOGO_NAME_.2]  58.29,101.66 90 top
LOGO6  OSHW-LOGOS  [OSHW-LOGO-S]  50.04,117.73 90 top
LOGO7  SFE_LOGO_NAME.2_INCH  [SFE_LOGO_NAME_.2]  112.9,16.83 90 top
LOGO8  OSHW-LOGOS  [OSHW-LOGO-S]  104.65,32.89 90 top
LOGO9  SFE_LOGO_NAME.2_INCH  [SFE_LOGO_NAME_.2]  112.9,59.25 90 top
LOGO10  OSHW-LOGOS  [OSHW-LOGO-S]  104.65,75.31 90 top
LOGO11  SFE_LOGO_NAME.2_INCH  [SFE_LOGO_NAME_.2]  112.9,101.66 90 top
LOGO12  OSHW-LOGOS  [OSHW-LOGO-S]  104.65,117.73 90 top
LOGO13  SFE_LOGO_NAME.2_INCH  [SFE_LOGO_NAME_.2]  167.51,16.83 90 top
LOGO14  OSHW-LOGOS  [OSHW-LOGO-S]  159.26,32.89 90 top
LOGO15  SFE_LOGO_NAME.2_INCH  [SFE_LOGO_NAME_.2]  167.51,59.25 90 top
LOGO16  OSHW-LOGOS  [OSHW-LOGO-S]  159.26,75.31 90 top
LOGO17  SFE_LOGO_NAME.2_INCH  [SFE_LOGO_NAME_.2]  167.51,101.66 90 top
LOGO18  OSHW-LOGOS  [OSHW-LOGO-S]  159.26,117.73 90 top
LOGO19  SFE_LOGO_NAME.2_INCH  [SFE_LOGO_NAME_.2]  222.12,16.83 90 top
LOGO20  OSHW-LOGOS  [OSHW-LOGO-S]  213.87,32.89 90 top
LOGO21  SFE_LOGO_NAME.2_INCH  [SFE_LOGO_NAME_.2]  222.12,59.25 90 top
LOGO22  OSHW-LOGOS  [OSHW-LOGO-S]  213.87,75.31 90 top
LOGO23  SFE_LOGO_NAME.2_INCH  [SFE_LOGO_NAME_.2]  222.12,101.66 90 top
LOGO24  OSHW-LOGOS  [OSHW-LOGO-S]  213.87,117.73 90 top
LOGO25  SFE_LOGO_NAME.2_INCH  [SFE_LOGO_NAME_.2]  276.73,16.83 90 top
LOGO26  OSHW-LOGOS  [OSHW-LOGO-S]  268.48,32.89 90 top
LOGO27  SFE_LOGO_NAME.2_INCH  [SFE_LOGO_NAME_.2]  276.73,59.25 90 top
LOGO28  OSHW-LOGOS  [OSHW-LOGO-S]  268.48,75.31 90 top
LOGO29  SFE_LOGO_NAME.2_INCH  [SFE_LOGO_NAME_.2]  276.73,101.66 90 top
LOGO30  OSHW-LOGOS  [OSHW-LOGO-S]  268.48,117.73 90 top
Q1  2.5A/30V  [SOT23-3]  24.64,21.46 180 top
Q2  MMBT2222A  [SOT23-3@1]  38.61,20.83 0 top
Q3  MMBT2222A  [SOT23-3@1]  42.42,20.83 0 top
Q4  MMBT2222A  [SOT23-3@1]  38.61,63.25 0 top
Q5  MMBT2222A  [SOT23-3@1]  42.42,63.25 0 top
Q6  2.5A/30V  [SOT23-3]  24.64,63.88 180 top
Q7  MMBT2222A  [SOT23-3@1]  38.61,105.66 0 top
Q8  MMBT2222A  [SOT23-3@1]  42.42,105.66 0 top
Q9  2.5A/30V  [SOT23-3]  24.64,106.3 180 top
Q10  MMBT2222A  [SOT23-3@1]  93.22,20.83 0 top
Q11  MMBT2222A  [SOT23-3@1]  97.03,20.83 0 top
Q12  2.5A/30V  [SOT23-3]  79.25,21.46 180 top
Q13  MMBT2222A  [SOT23-3@1]  93.22,63.25 0 top
Q14  MMBT2222A  [SOT23-3@1]  97.03,63.25 0 top
Q15  2.5A/30V  [SOT23-3]  79.25,63.88 180 top
Q16  MMBT2222A  [SOT23-3@1]  93.22,105.66 0 top
Q17  MMBT2222A  [SOT23-3@1]  97.03,105.66 0 top
Q18  2.5A/30V  [SOT23-3]  79.25,106.3 180 top
Q19  MMBT2222A  [SOT23-3@1]  147.83,20.83 0 top
Q20  MMBT2222A  [SOT23-3@1]  151.64,20.83 0 top
Q21  2.5A/30V  [SOT23-3]  133.86,21.46 180 top
Q22  MMBT2222A  [SOT23-3@1]  147.83,63.25 0 top
Q23  MMBT2222A  [SOT23-3@1]  151.64,63.25 0 top
Q24  2.5A/30V  [SOT23-3]  133.86,63.88 180 top
Q25  MMBT2222A  [SOT23-3@1]  147.83,105.66 0 top
Q26  MMBT2222A  [SOT23-3@1]  151.64,105.66 0 top
Q27  2.5A/30V  [SOT23-3]  133.86,106.3 180 top
Q28  MMBT2222A  [SOT23-3@1]  202.44,20.83 0 top
Q29  MMBT2222A  [SOT23-3@1]  206.25,20.83 0 top
Q30  2.5A/30V  [SOT23-3]  188.47,21.46 180 top
Q31  MMBT2222A  [SOT23-3@1]  202.44,63.25 0 top
Q32  MMBT2222A  [SOT23-3@1]  206.25,63.25 0 top
Q33  2.5A/30V  [SOT23-3]  188.47,63.88 180 top
Q34  MMBT2222A  [SOT23-3@1]  202.44,105.66 0 top
Q35  MMBT2222A  [SOT23-3@1]  206.25,105.66 0 top
Q36  2.5A/30V  [SOT23-3]  188.47,106.3 180 top
Q37  MMBT2222A  [SOT23-3@1]  257.05,20.83 0 top
Q38  MMBT2222A  [SOT23-3@1]  260.86,20.83 0 top
Q39  2.5A/30V  [SOT23-3]  243.08,21.46 180 top